# Altium PCB FLX5.PcbDoc (part 4 of 4)
Units mm, origin at the board's own origin, x right, y up, seen from the top; angles counter-clockwise.
Board outline 45.2 x 54.5 mm, 4 copper layers (Top Layer, gndplane, vplane, Bottom Layer), stack 1.596 mm thick; 151 components, 82 nets, 455 pads, 132 vias.
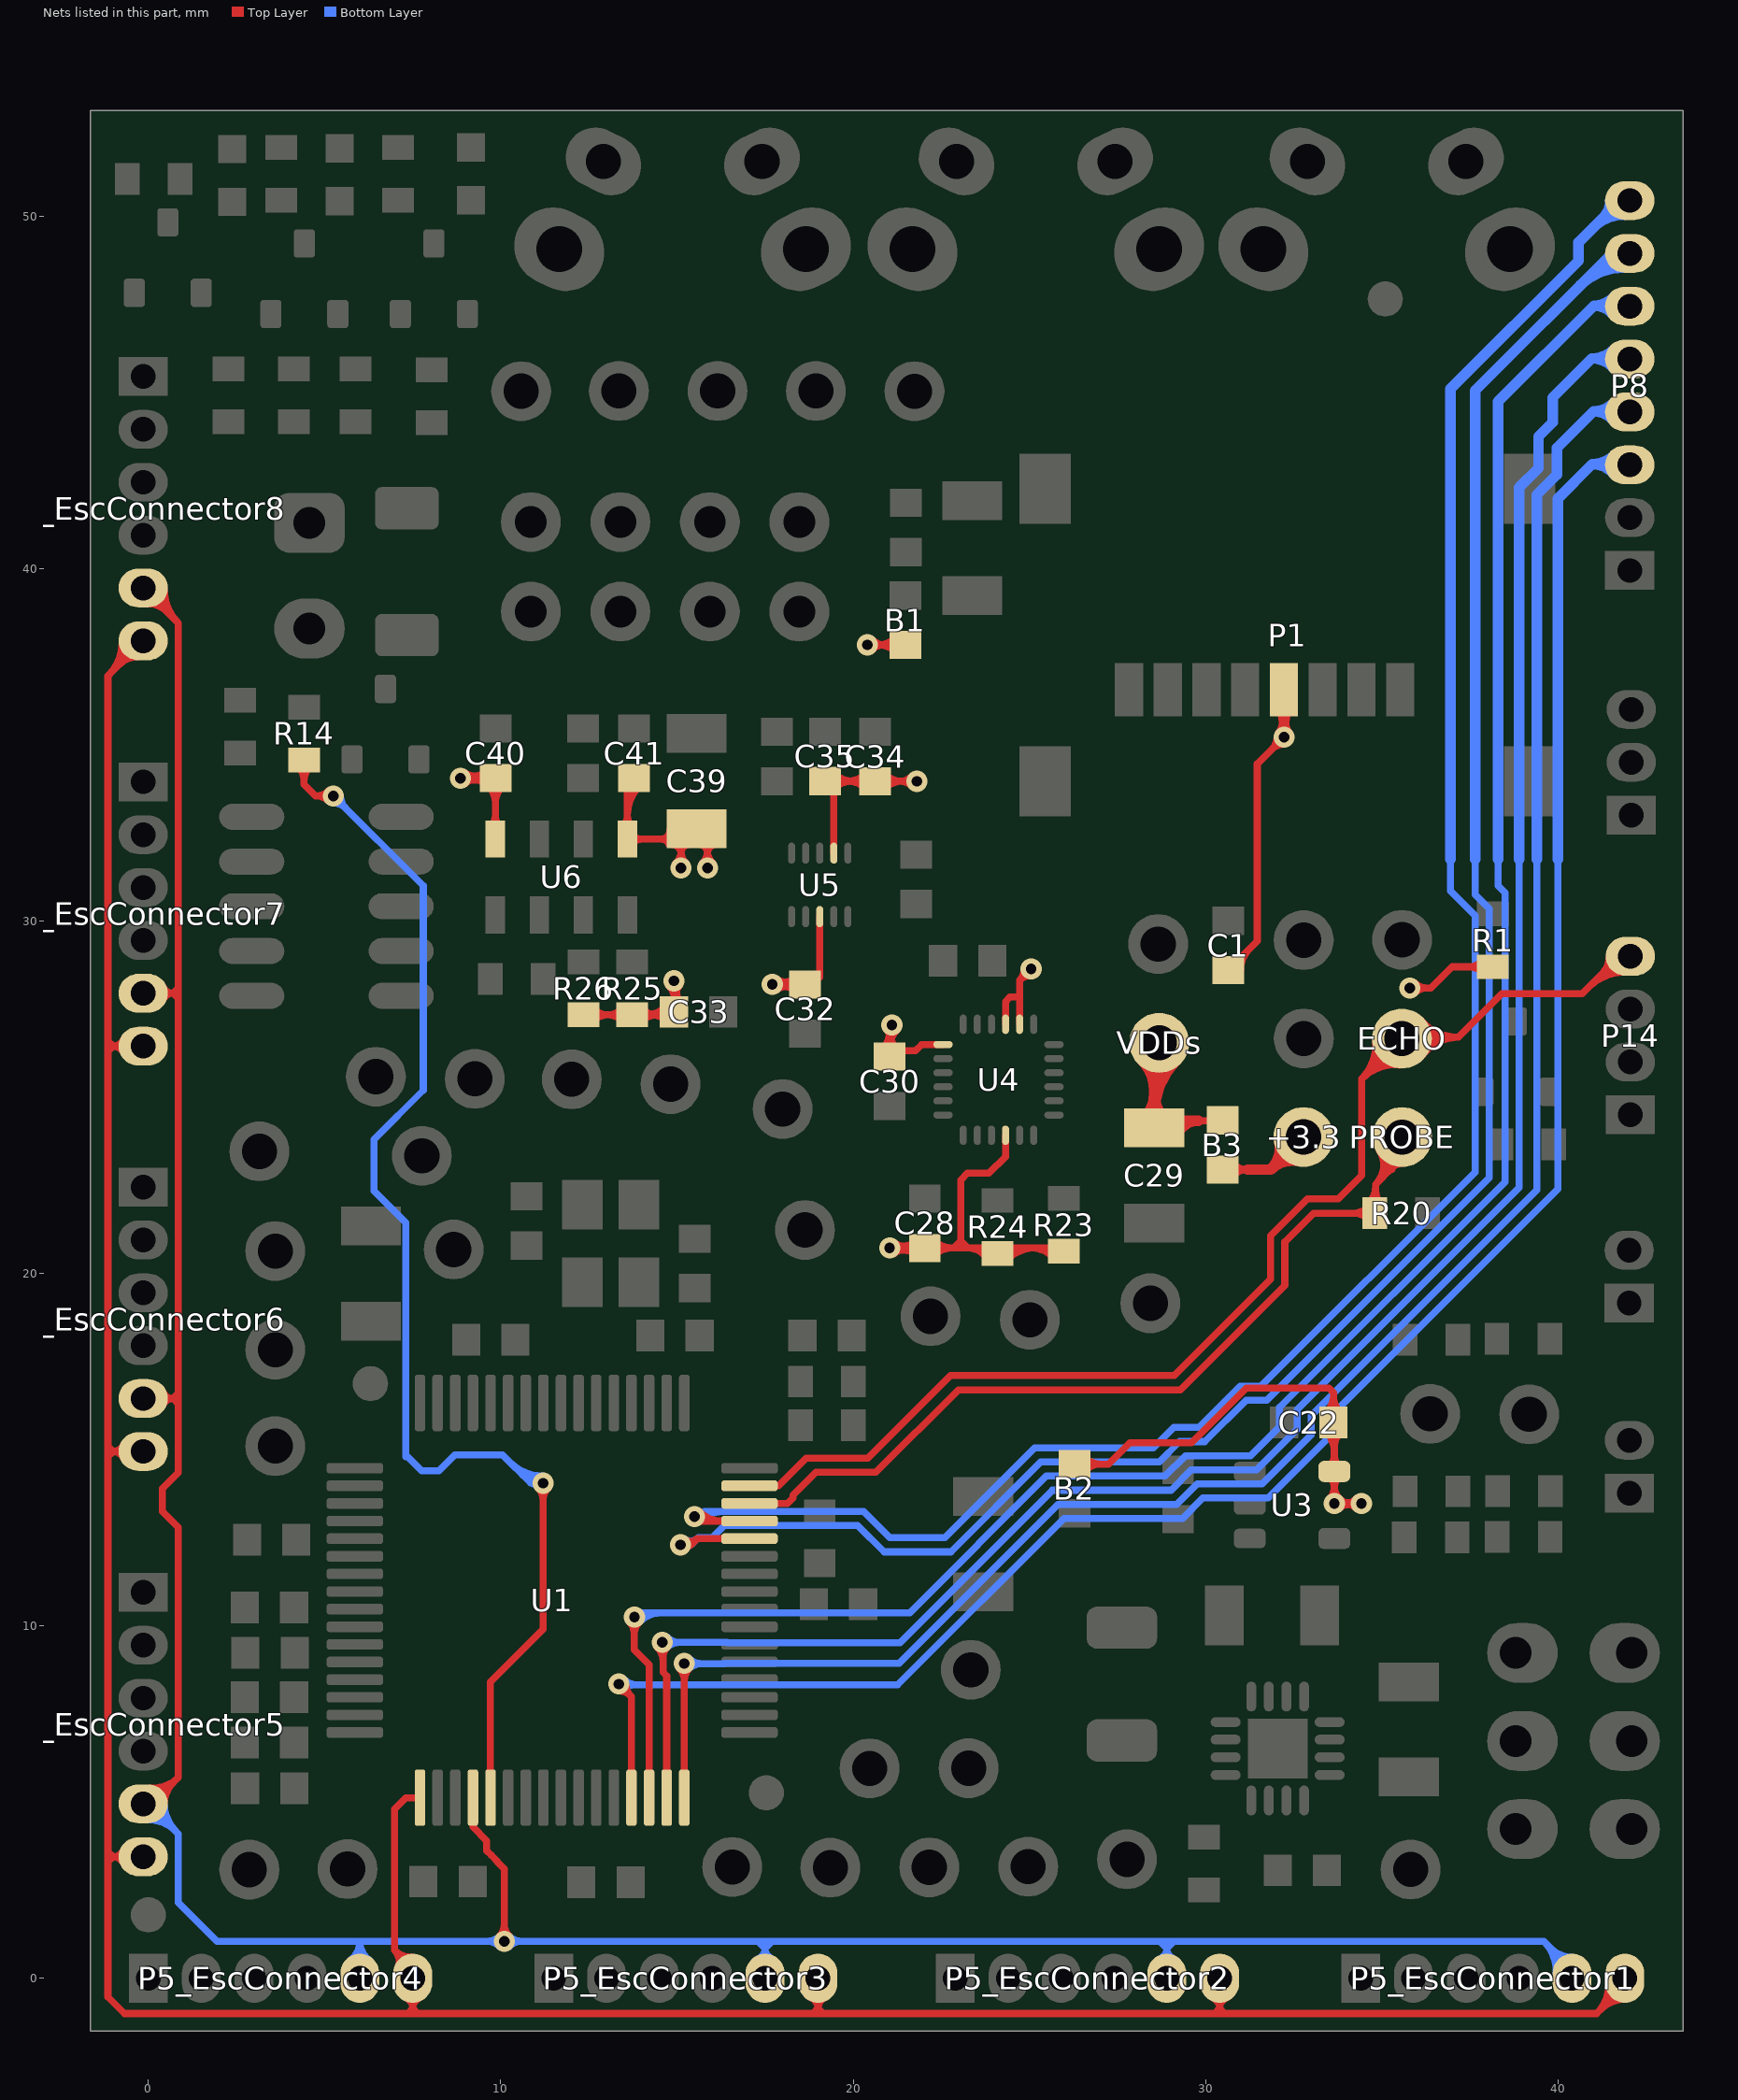
[diagram p6: the nets of this part, all layers, seen from the top]

## Via types
v1: diameter 0.6, hole 0.3, Top Layer to Bottom Layer, 132 vias

## Nets (pads, with @x,y where several pads share a name; then routed paths per layer and width w, separated by ;. In a path a pad name is that pad's centre, name@x,y a point inside that pad or via, vN(x,y) a via of type N, cw(c..) or ccw(c..) an arc to the next point about the centre after c; other vN are vias at no path point) (continued)
SSI2RX: P5_EscConnector1.6 P5_EscConnector2.6 P5_EscConnector3.6 P5_EscConnector4.6 P5_EscConnector5.6 P5_EscConnector6.6 P5_EscConnector7.6 P5_EscConnector8.6 U1.1 | length 107.3
  Top Layer w0.2: -1.15,36.95 ccw(c-2.116,37.916) P5_EscConnector8.6@-0.75,37.942 ; -1.05,3.45 -1,3.45 ; -1.002,3.448 -1.15,3.3 ; -1.002,26.448 -1.15,26.3 ; -0.817,37.283 ccw(c-1.463,37.928) P5_EscConnector8.6@-0.55,37.945 ; -0.812,37.288 cw(c-0.3,36.776) P5_EscConnector8.6@-0.3,37.5 ; P5_EscConnector5.6@-0.709,3.263 ccw(c-1,3.131) -1,3.45 ; P5_EscConnector5.6@-0.709,3.637 cw(c-1,3.769) -1,3.45 ; P5_EscConnector6.6@-0.709,14.763 ccw(c-1,14.631) -1,14.95 ; P5_EscConnector6.6@-0.709,15.137 cw(c-1,15.269) -1,14.95 ; P5_EscConnector7.6@-0.709,26.263 ccw(c-1,26.131) -1,26.45 ; P5_EscConnector7.6@-0.709,26.637 cw(c-1,26.769) -1,26.45 ; P5_EscConnector5.6@-0.15,3.45 -1,3.45 ; P5_EscConnector6.6@-0.15,14.95 -1,14.95 ; P5_EscConnector7.6@-0.15,26.45 -1,26.45 ; P5_EscConnector8.6@-0.15,37.95 -1.15,36.95 -1.15,26.6 ; P5_EscConnector4.6@7.083,0.319 ccw(c6.675,0.484) 6.986,0.795 ; P5_EscConnector4.6@7.313,-0.559 cw(c7.181,-0.85) 7.5,-0.85 ; P5_EscConnector4.6@7.352,0 P5_EscConnector4.6@7.5,-0.148 ; P5_EscConnector4.6@7.483,0.6 cw(c7.458,1.267) 6.986,0.795 ; 7.502,-0.852 7.65,-1 ; P5_EscConnector4.6@7.687,-0.559 ccw(c7.819,-0.85) 7.5,-0.85 ; U1.1@7.708,5.125 7.306,5.125 6.986,4.805 6.986,0.795 ; P5_EscConnector3.6@18.813,-0.559 cw(c18.681,-0.85) 19,-0.85 ; P5_EscConnector3.6@19,0 19,-0.85 ; 19.002,-0.852 19.15,-1 ; P5_EscConnector3.6@19.187,-0.559 ccw(c19.319,-0.85) 19,-0.85 ; P5_EscConnector2.6@30.213,-0.559 cw(c30.081,-0.85) 30.4,-0.85 ; P5_EscConnector2.6@30.4,0 30.4,-0.85 ; 30.402,-0.852 30.55,-1 ; P5_EscConnector2.6@30.587,-0.559 ccw(c30.719,-0.85) 30.4,-0.85 ; 41.217,-0.883 cw(c41.9,-1.566) P5_EscConnector1.6@41.9,-0.6 ; 41.44,-0.66 ccw(c40.933,-0.153) P5_EscConnector1.6@41.65,-0.151 ; P5_EscConnector1.6@41.45,-0.151 cw(c40.255,-0.155) 41.1,-1 ; P5_EscConnector1.6@41.9,0 41.9,-0.2 41.1,-1 ; -1.15,3.3 -1.15,-0.524 -0.674,-1 7.35,-1 ; -1.15,3.3 -1.15,3.6 ; -1.15,3.6 -1.15,14.8 ; -1.15,3.6 -1,3.45 ; -1.15,14.8 -1.15,14.95 ; -1.15,14.8 -1.002,14.948 -1,14.948 -1,14.95 ; -1.15,14.95 -1.15,15.1 ; -1.15,14.95 -1,14.95 ; -1.15,15.1 -1,14.95 ; -1.15,15.1 -1.15,26.3 ; -1.15,26.3 -1.15,26.45 ; -1.15,26.45 -1.15,26.6 ; -1.15,26.45 -1,26.45 ; -1.15,26.6 -1,26.45 ; 6.986,0.795 7.5,0.281 P5_EscConnector4.6@7.5,0 P5_EscConnector4.6@7.5,-0.148 ; 7.35,-1 7.5,-1 ; 7.35,-1 7.5,-0.85 ; 7.5,-1 7.65,-1 ; 7.5,-1 7.5,-0.85 ; 7.5,-0.85 P5_EscConnector4.6@7.5,-0.148 ; 7.65,-1 18.85,-1 ; 18.85,-1 19,-1 ; 18.85,-1 19,-0.85 ; 19,-1 19.15,-1 ; 19,-1 19,-0.85 ; 19.15,-1 30.25,-1 ; 30.25,-1 30.4,-1 ; 30.25,-1 30.4,-0.85 ; 30.4,-1 30.55,-1 ; 30.4,-1 30.4,-0.85 ; 30.55,-1 41.1,-1
SSI2TX: P5_EscConnector1.5 P5_EscConnector2.5 P5_EscConnector3.5 P5_EscConnector4.5 P5_EscConnector5.5 P5_EscConnector6.5 P5_EscConnector7.5 P5_EscConnector8.5 U1.4 | length 107.3
  Top Layer w0.2: P5_EscConnector5.5@-0.15,4.95 0.1,4.95 0.85,5.7 ; P5_EscConnector6.5@-0.15,16.45 0.7,16.45 ; P5_EscConnector7.5@-0.15,27.95 0.7,27.95 ; P5_EscConnector8.5@-0.15,39.45 0.85,38.45 ; P5_EscConnector8.5@0,39 cw(c0,38.276) 0.512,38.788 ; P5_EscConnector5.5@0.019,5.199 ccw(c0.071,5.865) 0.543,5.393 ; P5_EscConnector5.5@0.035,5.399 ccw(c0.115,6.435) 0.85,5.7 ; P5_EscConnector8.5@0.25,39.445 ccw(c1.163,39.428) 0.517,38.783 ; P5_EscConnector6.5@0.409,16.263 cw(c0.7,16.131) 0.7,16.45 ; P5_EscConnector6.5@0.409,16.637 ccw(c0.7,16.769) 0.7,16.45 ; P5_EscConnector7.5@0.409,27.763 cw(c0.7,27.631) 0.7,27.95 ; P5_EscConnector7.5@0.409,28.137 ccw(c0.7,28.269) 0.7,27.95 ; P5_EscConnector5.5@0.45,4.95 cw(c1.295,4.95) 0.697,5.547 ; P5_EscConnector8.5@0.45,39.442 ccw(c1.816,39.416) 0.85,38.45 ; 0.85,27.749 0.85,27.8 ; U1.4@9.208,5.125 9.208,4.292 9.6,3.9 9.6,3.621 9.726,3.495 9.901,3.32 9.901,3.299 10.1,3.1 v1(10.1,1.05) ; v1@9.959,1.191 ccw(c9.617,1.533) 10.1,1.533 ccw(c10.583,1.533) v1@10.241,1.191 ; 0.7,16.45 0.85,16.3 ; 0.7,16.45 0.85,16.6 ; 0.7,16.45 0.85,16.45 ; 0.7,27.95 0.85,27.8 ; 0.7,27.95 0.85,28.1 ; 0.7,27.95 0.85,27.95 ; 0.85,5.7 0.85,7.598 0.85,12.8 0.4,13.25 0.4,13.9 0.85,14.35 0.85,16.3 ; 0.85,16.3 0.85,16.45 ; 0.85,16.45 0.85,16.6 ; 0.85,16.6 0.85,27.8 ; 0.85,27.8 0.85,27.95 ; 0.85,27.95 0.85,28.1 ; 0.85,28.1 0.85,38.45
  Bottom Layer w0.2: P5_EscConnector5.5@-0.15,4.95 0,4.95 0.85,4.1 0.85,2.15 1.95,1.05 6,1.05 ; P5_EscConnector5.5@0,4.5 cw(c0,3.414) 0.768,4.182 cw(c1.536,4.95) P5_EscConnector5.5@0.45,4.95 ; P5_EscConnector5.5@0,4.7 cw(c0,4.096) 0.427,4.523 cw(c0.854,4.95) P5_EscConnector5.5@0.25,4.95 ; P5_EscConnector4.5@5.73,0.51 ccw(c5.325,1.05) 6,1.05 ; P5_EscConnector4.5@6,0 6,1.05 ; P5_EscConnector4.5@6.27,0.51 cw(c6.675,1.05) 6,1.05 ; v1@9.959,0.909 ccw(c9.617,0.567) 9.617,1.05 ccw(c9.617,1.533) v1@9.959,1.191 ; v1@10.241,0.909 cw(c10.583,0.567) 10.583,1.05 cw(c10.583,1.533) v1@10.241,1.191 ; P5_EscConnector3.5@17.313,0.559 ccw(c17.181,0.85) 17.5,0.85 ; P5_EscConnector3.5@17.5,0 17.5,0.85 ; P5_EscConnector3.5@17.687,0.559 cw(c17.819,0.85) 17.5,0.85 ; P5_EscConnector2.5@28.713,0.559 ccw(c28.581,0.85) 28.9,0.85 ; P5_EscConnector2.5@28.9,0 28.9,0.85 ; P5_EscConnector2.5@29.087,0.559 cw(c29.219,0.85) 28.9,0.85 ; 39.803,0.847 ccw(c40.4,1.445) P5_EscConnector1.5@40.4,0.6 ; 39.927,0.723 cw(c39.386,0.183) P5_EscConnector1.5@40.15,0.158 ; P5_EscConnector1.5@39.95,0.164 ccw(c38.753,0.203) 39.6,1.05 ; P5_EscConnector1.5@40.4,0 40.4,0.25 39.6,1.05 ; 6,1.05 v1(10.1,1.05) 17.3,1.05 ; 17.3,1.05 17.5,0.85 ; 17.3,1.05 17.5,1.05 ; 17.5,0.85 17.7,1.05 ; 17.5,0.85 17.5,1.05 ; 17.5,1.05 17.7,1.05 ; 17.7,1.05 28.683,1.05 28.7,1.05 ; 28.7,1.05 28.95,1.05 ; 28.7,1.05 28.9,0.85 ; 28.9,0.85 29.1,1.05 ; 28.9,0.85 28.9,1 28.95,1.05 ; 28.95,1.05 29.1,1.05 ; 29.1,1.05 39.6,1.05
T0CCP0: P8.7 U1.28 | length 62.8
  Top Layer w0.2: v1@15.225,12.456 ccw(c15.39,12.661) 15.576,12.475 ; v1@15.284,12.222 cw(c15.401,12.173) 15.401,12.3 ; v1@15.284,12.378 ccw(c15.401,12.427) 15.401,12.3 ; 15.419,12.317 cw(c15.25,12.486) v1(15.1,12.3) 15.401,12.3 ; U1.28@17.058,12.475 15.576,12.475 ; 15.401,12.3 15.576,12.475
  Bottom Layer w0.2: v1@15.213,12.465 ccw(c15.386,12.715) 15.601,12.5 ; v1@15.284,12.222 cw(c15.401,12.173) 15.401,12.3 ; v1@15.284,12.378 ccw(c15.401,12.427) 15.401,12.3 ; 15.432,12.33 cw(c15.248,12.514) v1(15.1,12.3) 15.401,12.3 ; 37.65,31.75 37.65,30.75 38.05,30.35 38.05,22.713 31.737,16.4 31.151,16.4 29.98,15.229 29.266,15.229 28.687,14.65 25.32,14.65 22.77,12.1 20.875,12.1 20.125,12.85 16.35,12.85 16,12.5 15.601,12.5 ; 15.401,12.3 15.601,12.5
  Bottom Layer w0.3: 37.65,31.75 37.65,45.05 41.564,48.964 P8.7@42.022,48.964 ; 40.619,48.019 cw(c41.888,46.749) P8.7@41.888,48.544 ; 41.131,48.531 cw(c41.888,47.774) P8.7@41.888,48.844
T0CCP1: P8.8 U1.29 | length 62.5
  Top Layer w0.2: v1(15.5,13.1) ccw(c15.803,13.403) 15.803,12.975 ; v1@15.5,13.15 15.675,12.975 U1.29@17.058,12.975 ; v1@15.641,13.241 ccw(c16.285,13.885) U1.29@16.285,12.975
  Bottom Layer w0.2: v1(15.5,13.1) cw(c15.862,12.738) 15.862,13.25 ; v1@15.5,13.15 15.5,13 15.536,13 15.786,13.25 20.291,13.25 21.041,12.5 22.605,12.5 25.155,15.05 28.521,15.05 29.1,15.629 29.815,15.629 30.986,16.8 31.571,16.8 37.65,22.879 37.65,30.153 36.95,30.853 36.95,31.75 ; v1@15.641,12.959 cw(c16.345,12.255) 16.345,13.25
  Bottom Layer w0.3: 36.95,31.75 36.95,45.1 40.586,48.736 40.586,49.257 41.774,50.444 P8.8@42.038,50.444 ; 41.01,49.681 cw(c41.888,48.802) P8.8@41.888,50.044 ; 41.286,49.957 ccw(c40.799,50.444) P8.8@41.488,50.444
T1CCP0: PROBE.1 R20.2 U1.30 | length 29.9
  Top Layer w0.2: U1.30@17.058,13.475 18.139,13.475 18.3,13.636 18.3,13.708 18.949,14.357 20.642,14.357 22.986,16.7 29.281,16.7 32.25,19.669 32.25,20.9 33.062,21.712 R20.2@34.802,21.712 34.83,21.74 34.83,22.534 ; R20.2@34.625,21.535 ccw(c34.198,21.108) 34.198,21.712 ccw(c34.198,22.315) R20.2@34.625,21.888 ; R20.2@34.625,21.988 ccw(c34.129,22.484) 34.83,22.484 ; 34.83,22.346 ccw(c35.336,22.346) R20.2@34.978,21.988 ; PROBE.1@34.941,23.478 cw(c34.288,23.077) 34.83,22.534 ; 35.009,22.713 ccw(c34.51,23.213) PROBE.1@35.112,23.583 ; PROBE.1@35.136,23.267 cw(c34.906,22.953) 35.295,22.953 ; 35.188,22.893 ccw(c34.732,23.349) PROBE.1@35.282,23.688 ; 35.301,23.005 cw(c35.58,22.727) PROBE.1@35.58,23.121 ; PROBE.1@35.63,23.971 35.295,23.635 35.295,22.999 34.83,22.534
T1CCP1: ECHO.1 P14.4 U1.31 | length 44.2
  Top Layer w0.2: U1.31@17.058,13.975 17.889,13.975 18.67,14.757 20.421,14.757 22.764,17.1 29.116,17.1 31.85,19.834 31.85,21.066 32.896,22.112 33.762,22.112 34.43,22.78 34.43,25.522 ; ECHO.1@34.824,26.599 cw(c33.468,26.484) 34.43,25.522 ; ECHO.1@35.023,26.616 cw(c34.029,26.531) 34.734,25.826 cw(c35.44,25.121) ECHO.1@35.524,26.115 ; ECHO.1@35.507,25.915 ccw(c35.392,24.56) 34.43,25.522 ; ECHO.1@35.571,26.663 34.43,25.522 ; ECHO.1@35.704,26.263 36.141,26.7 37.173,26.7 ; ECHO.1@35.979,27.031 ccw(c36.723,27.702) 36.723,26.7 ; ECHO.1@36.006,26.327 cw(c36.766,25.74) 36.766,26.7 ; ECHO.1@36.128,27.165 ccw(c37.173,28.107) 37.173,26.7 ; ECHO.1@36.165,26.205 cw(c37.173,25.426) 37.173,26.7 ; 40.873,28.123 cw(c41.904,27.092) P14.4@41.904,28.55 ; 41.214,28.464 cw(c41.904,27.775) P14.4@41.904,28.75 ; 41.245,28.495 ccw(c40.739,29) P14.4@41.454,29 ; P14.4@42.054,29 41.75,29 40.692,27.942 38.415,27.942 37.173,26.7
T2CCP0: R14.2 U1.5 | length 41.9
  Top Layer w0.2: R14.2@4.239,34.394 cw(c3.812,33.967) 4.416,33.967 cw(c5.019,33.967) R14.2@4.592,34.394 ; R14.2@4.416,34.571 4.416,33.884 4.75,33.55 v1(5.25,33.55) ; v1@5.109,33.409 ccw(c4.767,33.067) 4.767,33.55 ccw(c4.767,34.033) v1@5.109,33.691 ; U1.5@9.708,5.125 9.708,8.408 11.2,9.9 v1(11.2,14.05) ; v1@11.059,13.909 cw(c10.717,13.567) 11.2,13.567 cw(c11.683,13.567) v1@11.341,13.909
  Bottom Layer w0.2: v1@5.25,33.35 cw(c5.25,32.867) 5.591,33.209 cw(c5.933,33.55) v1@5.45,33.55 ; v1(5.25,33.55) 7.8,31 7.8,25.2 6.4,23.8 6.4,22.341 7.3,21.441 7.3,14.8 7.351,14.8 7.751,14.4 8.248,14.4 8.698,14.85 10.05,14.85 10.85,14.05 ; 10.261,14.639 ccw(c11.2,15.578) v1@11.2,14.25 ; 10.603,14.297 ccw(c11.2,14.895) v1(11.2,14.05) 10.85,14.05 ; v1@11.028,13.948 ccw(c10.85,13.844) 10.85,14.05 ; v1@11.028,14.152 cw(c10.85,14.256) 10.85,14.05
V3.3: +3.3.1 B1.1 B2.1 B3.1 C1.1 C22.1 P1.4 U3.5 | length 42.3
  Top Layer w0.2: v1(20.4,37.837) B1.1@21.483,37.837 ; v1@20.541,37.695 cw(c20.883,37.354) 20.883,37.837 cw(c20.883,38.319) v1@20.541,37.978 ; B1.1@21.22,37.625 ccw(c20.708,37.112) 20.708,37.837 ccw(c20.708,38.561) B1.1@21.22,38.049 ; B2.1@26.278,14.592 27.242,14.592 27.85,15.2 29.6,15.2 31.15,16.75 33.5,16.75 33.63,16.62 C22.1@33.63,15.769 33.655,15.744 U3.5@33.655,14.382 v1(33.655,13.469) v1(34.425,13.469) ; B2.1@26.54,14.38 cw(c27.052,13.868) 27.052,14.592 cw(c27.052,15.316) B2.1@26.54,14.804 ; B3.1@30.483,22.946 31.191,22.946 ; C1.1@30.641,28.605 31.468,29.431 31.468,34.459 v1(32.227,35.218) P1.4@32.227,36.563 ; C1.1@30.691,28.905 ccw(c30.691,29.508) 31.118,29.081 ; B3.1@30.759,22.749 cw(c31.191,22.375) 31.191,22.946 ; B3.1@30.759,23.143 ccw(c31.191,23.517) 31.191,22.946 ; C1.1@30.991,28.605 cw(c31.836,28.605) 31.238,29.202 ; P1.4@32.014,36.001 cw(c31.502,35.489) 32.227,35.489 cw(c32.951,35.489) P1.4@32.439,36.001 ; v1@32.027,35.218 cw(c31.544,35.218) 31.885,34.876 cw(c32.227,34.535) v1@32.227,35.018 ; v1@32.074,35.347 ccw(c31.749,35.623) 32.161,35.734 ; v1@32.085,35.359 ccw(c31.744,35.7) 32.227,35.7 ccw(c32.709,35.7) v1@32.368,35.359 ; v1@32.127,35.391 ccw(c32.005,35.601) 32.24,35.538 ; 32.213,35.538 ccw(c32.448,35.601) v1@32.327,35.391 ; 32.292,35.734 ccw(c32.704,35.623) v1@32.379,35.347 ; C22.1@33.418,15.507 cw(c32.844,14.933) 33.655,14.933 ; C22.1@33.418,16.031 ccw(c32.906,16.543) 33.63,16.543 ccw(c34.354,16.543) C22.1@33.842,16.031 ; v1@33.514,13.611 ccw(c33.173,13.952) 33.655,13.952 ccw(c34.138,13.952) 33.797,13.611 ccw(c34.138,13.952) 34.138,13.469 ccw(c34.138,12.987) v1@33.797,13.328 ; U3.5@33.514,14.24 cw(c33.173,13.899) 33.655,13.899 cw(c34.138,13.899) U3.5@33.797,14.24 ; U3.5@33.514,14.523 ccw(c33.173,14.865) 33.655,14.865 ccw(c34.138,14.865) U3.5@33.797,14.523 ; 33.655,15.056 cw(c34.293,15.056) C22.1@33.842,15.507 ; 34.021,13.438 cw(c34.08,13.219) v1@34.263,13.352 ; 34.021,13.501 ccw(c34.08,13.719) v1@34.263,13.587 ; 34.112,13.462 ccw(c34.053,13.684) v1@34.252,13.569 ; 34.112,13.476 cw(c34.053,13.255) v1@34.252,13.369 ; v1@34.283,13.328 ccw(c33.942,12.987) 33.942,13.469 ccw(c33.942,13.952) v1@34.283,13.611
  Top Layer w0.3: 31.191,22.946 31.854,22.946 ; +3.3.1@32.094,23.735 cw(c31.236,23.565) 31.854,22.946 ; +3.3.1@32.643,23.185 ccw(c32.473,22.328) 31.854,22.946 ; +3.3.1@32.78,23.872 31.854,22.946
VDD: R1.2 | length 4.3
  Top Layer w0.2: v1(35.8,28.1) 36.398,28.1 36.999,28.701 R1.2@38.155,28.701 ; v1@35.941,27.958 cw(c36.283,27.617) 36.283,28.1 cw(c36.283,28.583) v1@35.941,28.241 ; R1.2@37.878,28.524 ccw(c37.451,28.097) 37.451,28.701 ccw(c37.451,29.304) R1.2@37.878,28.878
VDDSENS: B3.2 C28.1 C29.1 C30.1 C32.1 C33.1 C34.1 C35.1 C39.1 C40.1 C41.1 R23.1 R24.1 R25.1 R26.1 U4.8 U4.9 U4.13 U4.22 U5.2 U5.8 U6.1 U6.4 VDDs.1 | length 80.4
  Top Layer w0.2: v1(8.852,34.05) 8.862,34.059 C40.1@9.851,34.059 9.842,34.051 U6.4@9.842,32.322 ; v1@8.973,34.209 ccw(c9.242,34.564) 9.357,34.134 ; v1@8.991,33.906 cw(c9.235,33.652) 9.327,33.992 ; v1@8.994,33.909 cw(c9.358,33.545) 9.358,34.059 ; v1@8.994,34.191 ccw(c9.313,34.51) 9.313,34.059 ; v1@9.026,33.95 cw(c9.299,33.792) 9.217,34.097 ; v1@9.026,34.15 ccw(c9.246,34.277) 9.18,34.032 ; C40.1@9.589,33.847 ccw(c9.077,33.335) 9.077,34.059 ccw(c9.077,34.784) C40.1@9.589,34.271 ; C40.1@9.639,33.847 cw(c9.147,33.355) 9.842,33.355 ; U6.4@9.719,32.696 ccw(c9.42,32.994) 9.842,32.994 ccw(c10.265,32.994) U6.4@9.966,32.696 ; 9.842,33.315 cw(c10.596,33.315) C40.1@10.063,33.847 ; R26.1@12.346,27.337 R25.1@13.732,27.337 C33.1@14.59,27.337 ; R26.1@12.622,27.161 cw(c13.048,26.736) 13.048,27.337 ; R26.1@12.622,27.515 ccw(c13.05,27.943) 13.05,27.337 ; R25.1@13.455,27.161 ccw(c13.028,26.734) 13.028,27.337 ccw(c13.028,27.941) R25.1@13.455,27.514 ; U6.1@13.469,32.696 ccw(c13.17,32.994) 13.592,32.994 ccw(c14.015,32.994) U6.1@13.716,32.696 ; C41.1@13.521,33.847 cw(c13.349,33.675) C41.1@13.592,33.675 ; 13.592,32.995 cw(c14.797,32.995) C41.1@13.945,33.847 ; 13.592,33.478 cw(c14.314,33.478) C41.1@13.804,33.989 ; U6.1@13.716,32.198 cw(c14.015,31.899) 14.015,32.322 cw(c14.015,32.744) U6.1@13.716,32.446 ; C41.1@13.783,34.059 13.592,33.869 U6.1@13.592,32.322 C39.1@15.259,32.322 ; R25.1@14.008,27.161 cw(c14.435,26.734) 14.435,27.337 cw(c14.435,27.941) R25.1@14.008,27.514 ; R25.1@14.11,27.337 ccw(c14.11,28.176) C33.1@14.704,27.583 ; 14.272,27.337 cw(c14.272,26.728) C33.1@14.704,27.159 ; v1@14.774,28.161 cw(c14.433,27.819) 14.916,27.819 cw(c15.399,27.819) v1@15.057,28.161 ; C39.1@14.774,32.183 ccw(c14.55,32.072) 14.55,32.322 ccw(c14.55,32.572) C39.1@14.8,32.572 ; v1@14.816,28.129 cw(c14.622,27.793) 14.997,27.893 ; C39.1@14.864,32.165 cw(c14.864,31.915) 15.114,31.915 ; C33.1@14.916,27.421 v1(14.916,28.302) ; v1@14.973,31.644 ccw(c14.631,31.985) 15.114,31.985 ccw(c15.597,31.985) v1@15.256,31.644 ; 15,27.879 cw(c15.31,27.962) v1@15.067,28.172 ; v1(15.114,31.503) 15.114,32.177 C39.1@15.259,32.322 ; 15.114,31.925 cw(c15.364,31.925) C39.1@15.364,32.175 ; C39.1@15.616,32.175 cw(c15.616,31.925) 15.866,31.925 cw(c16.116,31.925) C39.1@16.116,32.175 ; C39.1@15.683,32.322 C39.1@15.259,32.322 ; v1@15.725,31.645 ccw(c15.383,31.987) 15.866,31.987 ccw(c16.349,31.987) v1@16.008,31.645 ; v1(15.866,31.504) 15.866,32.315 C39.1@15.559,32.622 C39.1@15.259,32.322 ; v1(17.703,28.2) C32.1@18.633,28.2 C32.1@18.37,28.463 ; v1@17.834,28.048 cw(c18.063,27.781) 18.154,28.121 ; v1@17.834,28.352 ccw(c18.063,28.619) 18.154,28.279 ; v1@17.845,28.059 cw(c18.186,27.717) 18.186,28.2 cw(c18.186,28.683) v1@17.845,28.341 ; v1@17.877,28.1 cw(c18.176,27.927) 18.086,28.261 ; v1@17.877,28.3 ccw(c18.176,28.473) 18.086,28.139 ; C32.1@18.371,27.988 ccw(c17.859,27.476) 17.859,28.2 ccw(c17.859,28.924) C32.1@18.371,28.412 ; C32.1@18.433,28.057 C32.1@18.433,28.082 ; C32.1@19.051,28.406 19.051,28.86 19.051,28.925 U5.8@19.051,30.125 ; U5.2@19.451,31.925 19.451,33.721 C35.1@19.199,33.973 20.615,33.973 C34.1@20.622,33.966 v1(21.808,33.966) ; C35.1@19.461,33.761 cw(c19.973,33.249) 19.973,33.973 cw(c19.973,34.697) C35.1@19.461,34.185 ; 19.831,33.973 cw(c19.831,33.225) C34.1@20.36,33.754 ; 19.865,33.973 ccw(c19.865,34.673) C34.1@20.36,34.178 ; C30.1@20.823,26.363 ccw(c20.311,26.875) 21.035,26.875 ccw(c21.759,26.875) C30.1@21.247,26.363 ; C34.1@20.884,33.754 cw(c21.397,33.242) 21.397,33.966 cw(c21.397,34.69) C34.1@20.884,34.178 ; v1@20.958,26.908 cw(c20.774,26.724) 21.035,26.724 ; v1(21.035,20.723) C28.1@22.033,20.723 22.85,20.723 ; C30.1@21.035,26.151 C30.1@21.035,26.406 ; C30.1@21.035,26.41 cw(c21.74,26.41) v1@21.241,26.908 ; 21.084,26.694 cw(c21.22,26.73) v1@21.17,26.863 ; v1(21.1,27.05) 21.1,27.092 21.035,27.157 C30.1@21.035,26.406 ; v1@21.165,20.571 cw(c21.421,20.269) 21.524,20.652 ; v1@21.165,20.875 ccw(c21.421,21.176) 21.524,20.794 ; v1@21.176,20.581 cw(c21.518,20.24) 21.518,20.723 cw(c21.518,21.206) v1@21.176,20.864 ; v1@21.208,20.623 cw(c21.455,20.48) 21.381,20.756 ; v1@21.208,20.823 ccw(c21.455,20.965) 21.381,20.69 ; v1@21.667,33.824 ccw(c21.325,33.483) 21.325,33.966 ccw(c21.325,34.449) v1@21.667,34.107 ; C28.1@21.771,20.511 ccw(c21.259,19.999) 21.259,20.723 ccw(c21.259,21.447) C28.1@21.771,20.935 ; C28.1@22.295,20.511 cw(c22.807,19.999) 22.807,20.723 cw(c22.807,21.447) C28.1@22.295,20.935 ; U4.13@22.549,26.496 21.947,26.496 21.772,26.32 21.121,26.32 C30.1@21.035,26.406 ; 23.622,20.723 cw(c23.622,20.321) R24.1@23.957,20.543 ; R24.1@23.79,20.433 ccw(c23.25,20.075) 23.25,20.723 ; R24.1@24.234,20.535 cw(c24.687,20.082) 24.687,20.723 ; U4.22@24.324,23.921 24.324,23.315 23.851,22.842 23.245,22.842 23.05,22.647 23.05,20.923 ; U4.9@24.324,27.071 24.324,27.716 24.45,27.842 24.724,27.842 ; R24.1@24.376,20.394 cw(c25.17,19.599) 25.17,20.723 ; U4.8@24.724,27.071 24.724,27.842 ; v1@24.85,28.635 cw(c24.419,28.621) 24.724,28.316 ; v1@24.931,28.659 24.931,28.523 24.724,28.316 ; 25.042,20.723 cw(c25.042,19.794) R23.1@25.698,20.451 ; v1@25.043,28.442 ccw(c25.029,28.011) 24.724,28.316 ; 25.501,20.723 ccw(c25.501,21.001) R23.1@25.698,20.804 ; 25.525,20.723 cw(c25.525,20.277) R23.1@25.84,20.592 ; R23.1@25.975,20.723 23.25,20.723 ; 29.797,24.333 30.47,24.333 B3.2@30.483,24.346 ; 22.85,20.723 23.25,20.723 ; 22.85,20.723 23.05,20.923 ; 23.05,20.923 23.25,20.723 ; 24.724,27.842 24.724,28.316
  Top Layer w0.3: VDDs.1@28.191,26.049 cw(c27.34,25.198) 28.544,25.198 ; C29.1@28.261,24.415 ccw(c27.578,25.098) 28.544,25.098 ccw(c29.509,25.098) C29.1@28.827,24.415 ; C29.1@28.544,24.51 cw(c30.72,24.51) VDDs.1@29.181,26.049 ; 28.544,25.235 cw(c29.996,25.235) VDDs.1@28.969,26.261 ; VDDs.1@28.686,26.544 28.544,26.402 28.544,24.333 29.797,24.333 ccw(c29.797,23.677) C29.1@29.205,23.96
  other v1: 25.05,28.642
WT0CCP0: P8.4 U1.16 | length 60.5
  Top Layer w0.2: v1@15.067,8.792 cw(c14.725,8.45) 15.208,8.45 cw(c15.691,8.45) v1@15.35,8.792 ; U1.16@15.208,5.125 v1(15.208,8.933)
  Bottom Layer w0.2: v1@15.205,8.925 16.341,8.925 16.35,8.933 21.301,8.933 25.817,13.45 29.184,13.45 29.763,14.029 31.609,14.029 33.002,15.422 33.002,15.968 39.4,22.366 39.4,31.75 ; v1@15.35,8.792 cw(c15.67,8.471) 15.67,8.925 ; v1@15.35,9.075 ccw(c15.712,9.437) 15.712,8.925
  Bottom Layer w0.3: 39.4,31.75 39.4,42.093 39.971,42.664 39.971,43.421 41.014,44.464 ; P8.4@41.576,44.194 ccw(c41.014,43.743) 41.014,44.464 ; P8.4@41.595,44.717 cw(c41.014,45.258) 41.014,44.464 ; P8.4@42.022,44.464 41.014,44.464
WT0CCP1: P8.5 U1.15 | length 62.6
  Top Layer w0.2: v1@14.442,9.392 cw(c14.04,8.99) 14.608,8.99 ; v1@14.6,9.35 14.608,9.342 14.608,8.685 14.708,8.585 U1.15@14.708,5.125 ; 14.608,9.111 cw(c15.006,9.111) v1@14.725,9.392
  Bottom Layer w0.2: v1(14.583,9.533) 16.422,9.533 16.43,9.525 21.326,9.525 25.652,13.85 29.018,13.85 29.597,14.429 31.443,14.429 32.6,15.586 32.6,16.132 38.9,22.432 38.9,31.75 ; v1@14.725,9.392 cw(c15.066,9.05) 15.066,9.533 cw(c15.066,10.016) v1@14.725,9.675
  Bottom Layer w0.3: 38.9,31.75 38.9,42.3 39.45,42.85 39.45,43.75 39.85,44.15 39.85,44.85 40.964,45.964 ; 40.969,45.964 ccw(c40.969,46.863) P8.5@41.605,46.227 ; P8.5@41.587,45.681 ccw(c40.964,45.136) 40.964,45.964 ; P8.5@42.022,45.964 40.964,45.964
WT1CCP0: P8.6 U1.14 | length 65.6
  Top Layer w0.2: v1@13.651,10.109 cw(c13.332,9.79) 13.783,9.79 ; 13.783,9.745 cw(c14.298,9.745) v1@13.934,10.109 ; v1@13.783,10.241 13.783,9.317 14.208,8.892 U1.14@14.208,5.125
  Bottom Layer w0.2: v1@13.792,10.109 14.058,10.375 21.611,10.375 25.486,14.25 28.853,14.25 29.432,14.829 31.277,14.829 32.1,15.652 32.1,16.197 38.5,22.597 38.5,30.8 38.3,31 38.3,31.75 ; v1(13.792,10.25) cw(c14.093,9.949) 14.093,10.375 ; v1@13.934,10.109 cw(c14.576,9.466) 14.576,10.375
  Bottom Layer w0.3: 38.3,31.75 38.3,44.737 41.027,47.464 ; P8.6@41.573,47.198 ccw(c41.027,46.771) 41.027,47.464 ; P8.6@41.592,47.714 cw(c41.027,48.228) 41.027,47.464 ; P8.6@42.022,47.464 41.027,47.464
WT1CCP1: P8.3 U1.13 | length 61.1
  Top Layer w0.2: v1@13.35,8.15 cw(c13.35,7.667) 13.691,8.009 cw(c14.033,8.35) v1@13.55,8.35 ; v1(13.35,8.35) 13.708,7.992 U1.13@13.708,5.125
  Bottom Layer w0.2: v1(13.35,8.35) 13.375,8.325 21.258,8.325 25.983,13.05 29.35,13.05 29.929,13.629 31.775,13.629 33.5,15.354 33.5,15.9 40,22.4 40,31.75 ; v1@13.491,8.209 cw(c13.773,7.927) 13.773,8.325 ; v1@13.491,8.491 ccw(c13.893,8.893) 13.893,8.325
  Bottom Layer w0.3: 40,31.75 40,41.986 40.978,42.964 ; P8.3@41.584,42.685 ccw(c40.978,42.166) 40.978,42.964 ; P8.3@41.603,43.225 cw(c40.978,43.843) 40.978,42.964 ; P8.3@42.022,42.964 40.978,42.964
pads on no net: P1.1 P1.8 P4.7 SW1.MOUNT1 SW1.MOUNT2 SW2.B1 SW2.B2 SW3.MOUNT1 SW3.MOUNT2 SW4.MOUNT1 SW4.MOUNT2 U1.33 U1.34 U1.36 U3.4 U4.1 U4.2 U4.3 U4.4 U4.5 U4.6 U4.7 U4.14 U4.15 U4.16 U4.17 U4.19 U4.21 U5.3 W1.1 W2.1 W3.1 W4.1
copper on no net: | length 1.2
  Top Layer w0.2: 19.051,31.925 19.051,33.15

## Polygon pours and split planes (outlines as drawn)
GND on Top Layer "Top Layer-No Net" (solid, pour order 16): 32.1,8.8 32.1,9.1 32.8,9.8 32.975,9.8 32.975,10.525 31.525,10.525 31.3,10.3 31.3,9.1 31,8.8
+5V on Top Layer "Top Layer-No Net" (solid, pour order 18): 30.725,9.807 30.725,9.075 30.179,8.529 26.621,8.529 26,9.15 26,11.65 26.35,12 29.05,12 29.25,11.8 29.25,11.3
NetL1_1 on Top Layer "Top Layer-No Net" (solid, pour order 17): 30.346,6.021 29.571,6.021 29.525,5.975 29.4,5.975 28.825,5.4 26.5,5.4 25.975,5.925 25.975,7.65 26.35,8.025 28.875,8.025 29.4,7.5 29.85,7.5 30.129,7.221 30.346,7.221
GND on Top Layer "Top Layer-No Net" (solid, pour order 15): 36.725,9.8 37,10.075 37,10.9 36.625,11.275 34.7,11.275 34.475,11.05 34.475,10.025 34.7,9.8
GND on gndplane (split plane): 196 vertices, not listed, extent -1.14,-0.99 43.04,52.49
VDDSENS on vplane (split plane): 23.148,34.511 23.148,32.4 23.157,32.302 23.186,32.208 23.232,32.121 23.295,32.045 30.115,25.224 30.115,20.02 18.293,20.02 17.252,21.061 17.252,22.2 17.243,22.298 17.214,22.392 17.168,22.479 17.105,22.555 15.705,23.955 15.629,24.018 15.542,24.064 15.448,24.093 15.35,24.102 11.658,24.102 8.852,26.908 8.852,34.9 8.852,36.398 21.261,36.398
V3.3 on vplane (split plane): 43.04,51.202 42.4,51.202 42.302,51.193 42.208,51.164 42.121,51.118 42.045,51.055 39.6,48.61 39.537,48.534 39.491,48.447 39.462,48.353 39.453,48.255 39.453,31.2 37.934,31.2 37.15,30.416 37.15,27.9 34.793,27.9 34.05,27.157 34.05,24.027 35.477,22.6 36.137,22.6 34.966,21.429 34.903,21.353 34.857,21.266 34.828,21.171 34.819,21.073 34.819,16.511 34.819,13.102 27.552,13.102 27.552,19.015 30.618,19.015 30.716,19.025 30.81,19.054 30.897,19.1 30.973,19.162 31.035,19.239 31.082,19.325 31.111,19.42 31.12,19.518 31.12,25.432 31.111,25.53 31.082,25.625 31.035,25.711 30.973,25.788 30.87,25.891 30.87,26.396 30.861,26.461 30.836,26.522 30.796,26.574 24.152,33.218 24.152,34.719 24.143,34.817 24.114,34.912 24.068,34.999 24.005,35.075 21.825,37.255 21.749,37.318 21.662,37.364 21.567,37.393 21.469,37.402 8.852,37.402 8.852,42.592 10.705,44.445 10.768,44.521 10.814,44.608 10.843,44.702 10.852,44.8 10.852,52.49 43.04,52.49
MVDD on vplane (split plane): 5.457,32.832 5.533,32.77 5.62,32.723 5.714,32.695 5.813,32.685 7.848,32.685 7.848,26.7 7.857,26.602 7.886,26.508 7.932,26.421 7.995,26.345 11.095,23.245 11.171,23.182 11.258,23.136 11.352,23.107 11.45,23.098 15.142,23.098 16.248,21.992 16.248,20.853 16.257,20.755 16.286,20.661 16.332,20.574 16.395,20.498 17.73,19.162 17.806,19.1 17.893,19.054 17.987,19.025 18.085,19.015 26.548,19.015 26.548,13.102 26.05,13.102 25.952,13.093 25.858,13.064 25.771,13.018 25.695,12.955 24.895,12.155 24.832,12.079 24.786,11.992 24.757,11.898 24.748,11.8 24.748,4.608 22.542,2.402 2.858,2.402 2.552,2.708 2.552,34.142 2.983,34.572 3.717,34.572
+5V on vplane (split plane): 9.848,45.008 7.995,43.155 7.932,43.079 7.886,42.992 7.857,42.898 7.848,42.8 7.848,34.9 7.848,33.69 6.021,33.69 4.281,35.43 4.204,35.492 4.118,35.539 4.023,35.567 3.925,35.577 2.775,35.577 2.677,35.567 2.582,35.539 2.496,35.492 2.419,35.43 1.695,34.705 1.632,34.629 1.586,34.542 1.557,34.448 1.548,34.35 1.548,2.5 1.557,2.402 1.586,2.308 1.632,2.221 1.695,2.145 2.295,1.545 2.371,1.482 2.458,1.436 2.552,1.407 2.65,1.398 22.75,1.398 22.848,1.407 22.942,1.436 23.029,1.482 23.105,1.545 25.605,4.045 25.668,4.121 25.714,4.208 25.743,4.302 25.752,4.4 25.752,11.592 26.258,12.098 35.321,12.098 35.419,12.107 35.513,12.136 35.6,12.182 35.676,12.245 35.739,12.321 35.785,12.408 35.814,12.502 35.823,12.6 35.823,16.511 35.823,20.865 37.558,22.6 39.855,22.6 39.955,22.7 39.955,24.997 40.31,25.352 40.373,25.428 40.419,25.515 40.448,25.609 40.457,25.707 40.457,48.047 42.608,50.198 43.04,50.198 43.04,-0.99 -1.14,-0.99 -1.14,52.49 9.848,52.49

## Keep-outs
Top Layer:
  rectangle: 26.85,39.1 36.8,45.75
Keep-Out Layer:
  lines w0.15: 13.421,23.2 15.091,23.2 cw(c15.091,21.889) 16.018,22.816 ; 16.018,22.836 16.05,21.9
  lines w0.3: 9.4,21.85 9.4,22.051 cw(c11.449,22.051) 10,23.5 12.696,23.5 cw(c12.696,22.646) 13.3,23.25 ccw(c13.421,23.371) 13.421,23.2 ; -1.65,-1.5 -1.65,53 43.55,53 43.55,-1.5 -1.65,-1.5

## Other copper
Bottom Layer:
  text "2014" at 35.049,39.85 h1.3
  text "b" at 35.5,38.8 h16
vplane (plane layer: these items are gaps in the copper):
  circle w0.8: c29.924,8.832 r0.125
  circle w0.8: c32.475,8.9 r0.125
  region: 39.955,31.2 37.934,31.2 37.15,30.416 37.15,27.9 34.793,27.9 34.05,27.157 34.05,24.027 35.477,22.6 39.855,22.6 39.955,22.7
  lines w0.5: 23.564,33.45 30.618,26.396 30.618,25.432
  lines w1: 8.35,34.9 8.35,26.7 11.45,23.6 15.35,23.6 16.75,22.2 16.75,20.853 18.085,19.518 30.618,19.518 30.618,25.432 23.65,32.4 23.65,34.719 21.469,36.9 8.35,36.9 ; 10.35,53 10.35,44.8 8.35,42.8 8.35,33.187 5.813,33.187 3.925,35.075 2.775,35.075 2.05,34.35 2.05,2.5 2.65,1.9 22.75,1.9 25.25,4.4 25.25,11.8 26.05,12.6 35.321,12.6 35.321,16.511 35.321,21.073 39.955,25.707 39.955,48.255 42.4,50.7 43.6,50.7 ; 27.05,12.7 27.05,19.518
gndplane (plane layer: these items are gaps in the copper):
  lines w0.5: 9.55,17.7 8.794,17.7 8.25,18.244 8.25,19.2 9.95,20.9 9.95,22.678 10.642,23.37 15.38,23.37 16.1,22.65 16.1,19 ; 40.75,12.15 40.75,21.7 41.65,22.6 43.55,22.6
  lines w1: 8.35,37.5 8.35,24.978 10.128,23.2 ; 30.15,53 30.15,48.3 28.748,46.898 11.35,46.898 10.25,45.798 10.25,44.7 8.35,42.8 8.35,36.9 21.45,36.9 23.65,34.7 23.65,32.6 30.25,26 30.25,19.75

## Silkscreen, mask and mechanical layers (free items; w line width, h text height)
Top Overlay:
  lines w0.1: 15.05,21.7 14.8,21.95 ; 15.05,22.2 14.8,21.95 ; 15.4,21.95 14.8,21.95
  lines w0.15: 1.625,39.488 1.55,38.95 1.55,36.85 1.95,36.4 ; 2.8,37.35 3.772,36.643 ; 16.1,26.35 16.1,26.662 ; 16.316,19.384 16.7,19 ; 16.388,26.662 16.1,26.662 ; 16.5,22.991 16.5,23.389 16.861,23.75 ; 16.508,23.75 16.861,23.75 ; 16.861,23.4 16.861,23.75 ; 16.92,26.35 16.412,26.35 16.1,26.662 ; 18.7,46.45 18.7,46.689 18.861,46.85 18.971,46.85 ; 20.639,16.211 21,15.85 ; 20.7,17.65 20.7,17.95 ; 21,17.95 20.7,17.95 ; 21.25,17.4 20.7,17.95 ; 21.309,8.521 21.309,7.987 22.195,7.1 ; 21.824,7.1 22.195,7.1 ; 22.195,7.459 22.195,7.1 ; 23.108,17.41 23.108,17.792 ; 23.395,16.35 23.395,17.505 23.108,17.792 ; 23.501,17.792 23.108,17.792 ; 25.8,31.182 29.632,31.182 ; 31.391,31.182 32.168,31.182 32.575,30.775 ; 32.175,30.775 32.575,30.775 ; 32.575,31.183 32.575,30.775 ; 34.95,13.8 34.6,14.15 34.6,16.35 34.4,16.55 ; 36.55,31.058 36.55,30.589 ; 36.65,22.55 36.65,22.905 ; 36.7,25.35 36.7,25.7 ; 36.949,30.589 36.55,30.589 ; 36.995,22.905 36.65,22.905 ; 37,21.178 37,22.555 36.65,22.905 ; 37.05,25.7 36.7,25.7 ; 37.75,22.25 37.75,23.736 37.122,25.278 36.7,25.7 ; 38.82,31.05 37.011,31.05 36.55,30.589 ; 34.4,16.55 30.5,16.55 30.5,19.158 34.4,19.158 34.4,16.55 ; 22.7,31.971 ccw(c22.871,31.971) 22.75,31.85 ccw(c22.991,32.091) 22.991,31.75 24.079,31.75 ccw(c24.079,32.092) 24.321,31.85 ccw(c24.031,32.141) 24.442,32.141 24.442,35.861 ccw(c24.031,35.861) 24.321,36.152 ccw(c24.084,35.914) 24.084,36.25 23.5,36.25 23.059,36.25 ccw(c23.059,35.914) 22.821,36.152 ccw(c23.115,35.859) 22.7,35.859 22.7,31.971
  lines w0.2: -1.55,1.95 -1.15,1.95 ; 1.1,1.95 1.25,1.95 ; 3.4,43.1 3.65,43.1 ; 3.801,4.25 4.15,4.599 ; 3.85,3.8 4.15,4.1 4.15,4.599 ; 4.499,4.25 4.15,4.599 ; 5.187,43.1 5.4,43.1
  text "12" at 3.8,42.75 h0.8
  text "13" at 5.6,42.75 h0.8
  text "2014" at 29.35,38.6 h1.5
  text "b" at 27.056,37.85 h15
  text "Flying" at 29.92,34.566 h1
  text "Automatons" at 27.728,33.644 h1
  text "REV.0" at 24.071,32.2 h1 r90
  text "FLX5-CTRL" at 28.483,31.75 h1
  text "MOSI" at 31.05,25.25 h0.8 r90
  text "2" at 15.613,21.822 h0.6
  text "16" at 1.5,13.15 h0.8
  text "9" at 1.55,10.15 h0.8
  text "6" at 1.55,8.85 h0.8
  text "4" at 1.55,7.6 h0.8
  text "7" at 1.55,6.3 h0.8
  text "5" at 1.55,4.977 h0.8
Bottom Overlay:
  lines w0.15: 33.5,3.6 33.5,10.1 ; 33.5,6.733 37.35,6.733 ; 7.3,29.217 ccw(c7.642,29.217) 7.4,28.975 ccw(c7.691,29.266) 7.691,28.855 11.411,28.855 ccw(c11.411,29.266) 11.702,28.975 ccw(c11.464,29.213) 11.8,29.213 11.8,29.797 11.8,30.238 ccw(c11.464,30.238) 11.702,30.475 ccw(c11.409,30.182) 11.409,30.597 7.521,30.597 ccw(c7.521,30.426) 7.4,30.547 ccw(c7.641,30.305) 7.3,30.305 7.3,29.217
  lines w0.4: 40.5,42.944 40.5,47.45 ; 40.5,48.944 40.5,50.45
  text "AUX" at 40.65,50.95 h0.6
  text "4" at 39.85,47 h0.8
  text "B" at 15.65,46.7 h1
  text "A" at 24,46.7 h1
  text "RESET" at 37.2,46.7 h1
  text "ESC8" at 1.5,43.05 h1.2 r270
  text "BUZZER" at 8.4,43.05 h1
  text "SCK" at 14.171,42.6 h0.8
  text "CE" at 16.8,42.6 h0.8
  text "1" at 39.65,42.55 h0.8
  text "GND" at 40.55,40.95 h0.8
  text "MISO" at 9.546,40.9 h0.8
  text "GND" at 22.05,40.9 h0.8
  text "5V" at 40.55,39.55 h0.8
  text "IRQ" at 9.4,38.35 h0.8
  text "3.3V" at 22.6,38.35 h0.8
  text "CTRL" at 40.6,37.75 h1.2
  text "MOSI" at 14.221,36.75 h0.8
  text "CSN" at 17.3,36.704 h0.8
  text "RX" at 40.6,35.6 h0.8
  text "7" at 1.65,35.35 h1.2 r270
  text "Flying Automatons" at 26.097,34.25 h1.5
  text "GND" at 40.6,34.05 h0.8
  text "nSS" at 3.484,33.6 h0.8
  text "TX" at 40.6,32.55 h0.8
  text "5V" at 2.684,32.1 h0.8
  text "flyx5.com.ar" at 22.551,31.555 h1.6
  text "SERIAL" at 40.7,30.75 h1.2
  text "GND" at 3.484,30.6 h0.8
  text "REV.0" at 11.3,29.225 h1
  text "CLK" at 3.484,29.15 h0.8
  text "FLX5-CTRL" at 26.097,28.95 h1.5
  text "ECHO" at 40.55,28.55 h0.8
  text "MOSI" at 4.017,27.55 h0.8
  text "PROBE" at 40.55,27.1 h0.8
  text "MISO" at 4.15,26.072 h0.8
  text "GND" at 40.55,25.55 h0.8
  text "5V" at 40.55,24.1 h0.8
  text "US" at 40.55,22.3 h1.2
  text "BATT-" at 40.25,20.3 h0.8
  text "6" at 1.45,18.9 h1.2 r270
  text "BATT+" at 40.25,18.685 h0.8
  text "a" at 25.6,18.6 h25 r90
  text "MAIN" at 35.9,18.5 h1.4
  text "BATT-" at 40.307,13.806 h0.8
  text "BATT+" at 40.307,12.192 h0.8
  text "AUX" at 36.25,11.725 h1.4
  text "ON" at 36.325,7.6 h1.2
  text "ESC5" at 1.4,6 h1.2 r270
  text "OFF" at 36.75,4.55 h1.2
  text "3" at 15.091,1.55 h1.2
  text "2" at 29.95,1.55 h1.2
  text "4" at 7.8,1.5 h1.2
  text "ESC1" at 42.6,1.5 h1.2
Bottom Solder:
  circle w2: c27.2,44.45 r2.001
  rectangle: 30.45,39.45 35.45,41.55
  rectangle: 25,43.25 35.793,45.5
Mechanical 1:
  the board outline again, w0.2
Mechanical 5:
  lines w0.15: 51.674,39.475 121.526,39.475 ; 51.674,41.88 121.526,41.88 ; -1.65,-1.5 -1.65,53 43.55,53 43.55,-1.5 -1.65,-1.5 ; 50.15,12.1 ccw(c50.9,12.1) 50.9,11.35 122.3,11.35 ccw(c122.3,12.1) 123.05,12.1 123.05,48 ccw(c122.3,48) 122.3,48.75 50.9,48.75 ccw(c50.9,48) 50.15,48 50.15,12.1
  text "Layer Stack Up Detail for: FLX5.PcbDoc" at 51.674,43.95 h1.8
  text "Layer" at 51.674,40.98 h0.55
  text "Gerber" at 66.612,40.98 h0.55
  text "Copper" at 74.429,40.98 h0.55
  text "Dielectric" at 83.144,40.98 h0.55
  text "Dielectric" at 92.243,40.98 h0.55
  text "Dielectric" at 103.432,40.98 h0.55
  text "Dielectric" at 112.532,40.98 h0.55
  text "Name" at 51.674,39.88 h0.55
  text "Document" at 66.612,39.88 h0.55
  text "Thickness" at 74.429,39.88 h0.55
  text "Height" at 83.144,39.88 h0.55
  text "Material" at 92.243,39.88 h0.55
  text "Constant" at 103.432,39.88 h0.55
  text "Type" at 112.532,39.88 h0.55
  text "Top Solder Mask" at 51.674,37.452 h0.75
  text "(.GTS)" at 66.612,37.452 h0.75
  text "0.0102mm" at 83.144,37.452 h0.75
  text "Solder Resist" at 92.243,37.452 h0.75
  text "3.50" at 103.432,37.452 h0.75
  text "Top Layer" at 51.674,33.556 h0.75
  text "(.GTL)" at 66.612,33.556 h0.75
  text "0.0356mm" at 74.429,33.556 h0.75
  text "0.127mm" at 83.144,31.608 h0.75
  text "FR-4" at 92.243,31.608 h0.75
  text "4.80" at 103.432,31.608 h0.75
  text "PrePreg" at 112.532,31.608 h0.75
  text "gndplane" at 51.674,29.66 h0.75
  text "(.GP1)" at 66.612,29.66 h0.75
  text "0.0356mm" at 74.429,29.66 h0.75
  text "1.2mm" at 83.144,27.713 h0.75
  text "FR-4" at 92.243,27.713 h0.75
  text "4.80" at 103.432,27.713 h0.75
  text "Core" at 112.532,27.713 h0.75
  text "vplane" at 51.674,25.765 h0.75
  text "(.GP2)" at 66.612,25.765 h0.75
  text "0.0356mm" at 74.429,25.765 h0.75
  text "0.127mm" at 83.144,23.817 h0.75
  text "FR-4" at 92.243,23.817 h0.75
  text "4.80" at 103.432,23.817 h0.75
  text "PrePreg" at 112.532,23.817 h0.75
  text "Bottom Layer" at 51.674,21.869 h0.75
  text "(.GBL)" at 66.612,21.869 h0.75
  text "0.0356mm" at 74.429,21.869 h0.75
  text "Bottom Solder Mask" at 51.674,17.973 h0.75
  text "(.GBS)" at 66.612,17.973 h0.75
  text "0.0102mm" at 83.144,17.973 h0.75
  text "Solder Resist" at 92.243,17.973 h0.75
  text "3.50" at 103.432,17.973 h0.75

## Dimensions
-1.65,53 to -1.65,-1.5 on Mechanical 5
-1.65,53 to 43.55,53 on Mechanical 5